# EAGLE board Lab2_board_yuhan (EAGLE 7.5.0)
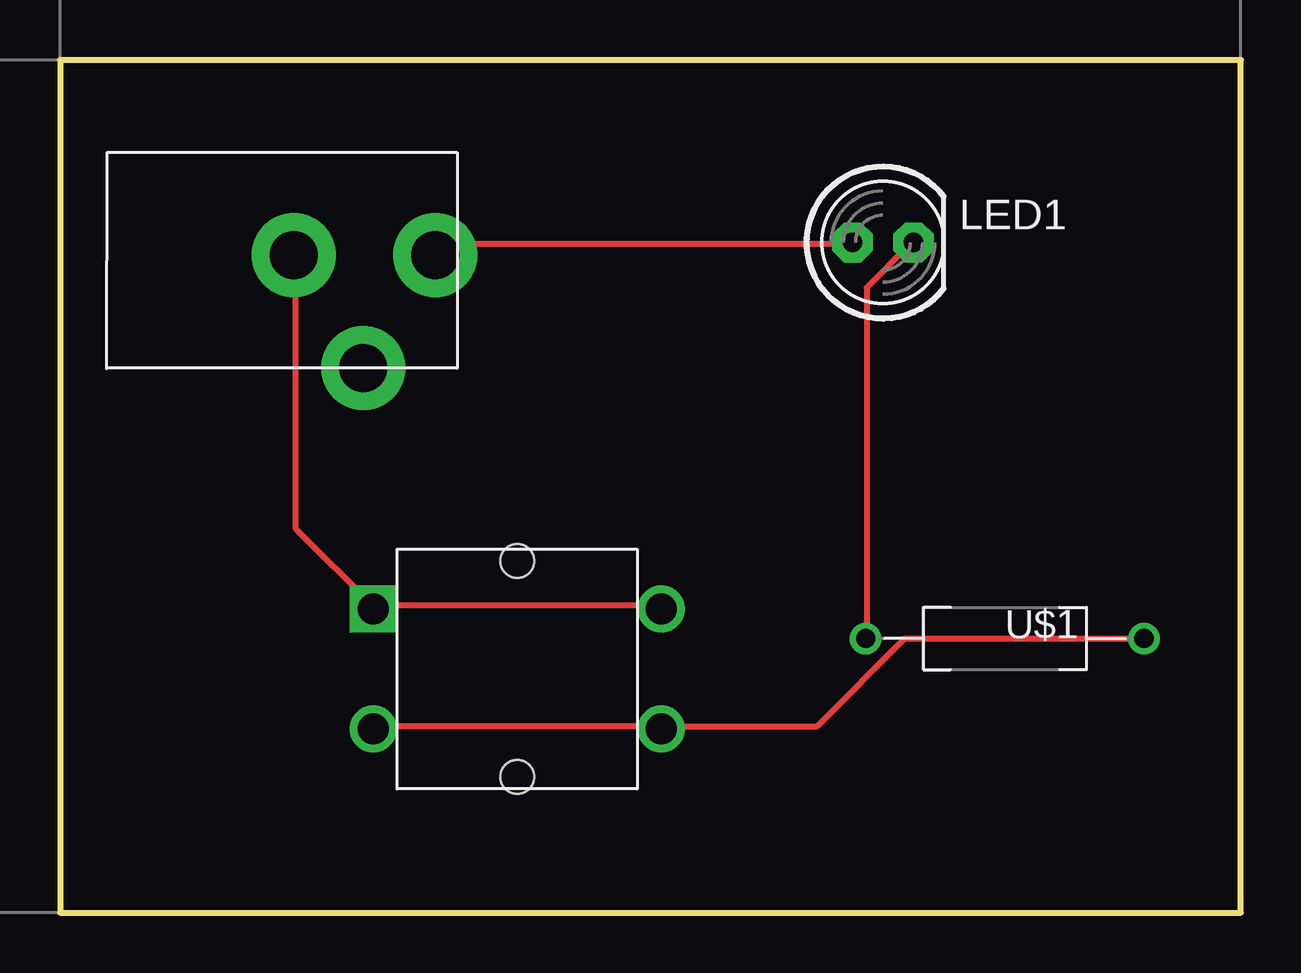
[diagram p0: board, top side]

Size 49.2 x 35.55 mm. Coordinates in mm from the lower left corner, seen from the top.
Outline: 0,0 49.2,0 49.2,35.55 0,35.55 0,0
Copper layers (1*16): Top 0.035559375mm / dielectric 1.501140625mm / Bottom 0.035559375mm
Design rules "4pcb-33board": minimum track width 6mil, minimum drill 15mil, track to track 6mil, track to pad 6mil, pad to pad 6mil, via to via 6mil, smd to smd 6mil, copper to edge 10mil, drill to drill 10mil, minimum pad ring 10mil, minimum via ring 8mil, stop-mask expansion 4mil, vias tented up to drill 0mil, thermal gap 10mil

## Footprints (pad centres in the part's own frame; a part is rotated, then mirrored left to right if it is on the bottom)
PJ-102A = drill 2 pad 3.5: RING -6.77,-4.345; RING_SW -3.87,-9.045; TIP -0.87,-4.345
LED5MM = drill 0.813 pad 1.676 octagon: A -1.27,0; K 1.27,0
BUTTON-TACTILE-SQUARE-ADAFRUIT1010 = drill 1.3 square: P -6,2.5 | drill 1.3: P2 6,2.5; S -6,-2.5; S2 6,-2.5 | hole 1.4: 0,4.5; 0,-4.5
RESAD1160W55L680D260_HS = drill 0.8 pad 1.2: 1 -5.8,0; 2 5.8,0

## Placement (x,y rotation side)
J1  2.1MMJACKTHM  [PJ-102A]  16.51,31.75 0 top
LED1  Red  [LED5MM]  34.29,27.94 0 top
S1  BUTTON-TACTILE-SQUARE  [BUTTON-TACTILE-SQUARE-ADAFRUIT1010]  19.05,10.16 0 top
U$1  330Ohms  [RESAD1160W55L680D260_HS]  39.37,11.43 0 top

## Library data of the parts
J1 LED1 S1 U$1 = Lab2

## Nets
N$1: LED1.K U$1.1
N$2: S1.S S1.S2 U$1.2
N$3: J1.TIP LED1.A
N$4: J1.RING S1.P S1.P2

## Tracks (layer width: path | path; a pad name or v marks a point on that pad's centre or on a via)
N$1
  Top 0.254: U$1.1 33.6,11.43 33.6,26.06 35.43,27.89 LED1.K
N$2
  Top 0.254: U$1.2 35.2,11.43 31.55,7.77 25.15,7.77 S1.S2 24.92,7.77 13.26,7.77 S1.S
N$3
  Top 0.254: LED1.A 32.92,27.89 16.23,27.89 15.77,27.43 J1.TIP
N$4
  Top 0.254: S1.P2 24.92,12.8 13.26,12.8 S1.P 13.03,12.8 9.83,16 9.83,27.2 J1.RING